# Altium PCB open-rt-pen.PcbDoc
Units mm, origin at the board's own origin, x right, y up, seen from the top; angles counter-clockwise.
Board outline 60 x 9.5 mm, 4 copper layers (Top Layer, Int1 (GND), Int2 (PWR), Bottom Layer), stack 1.642 mm thick; 62 components, 42 nets, 211 pads, 182 vias.
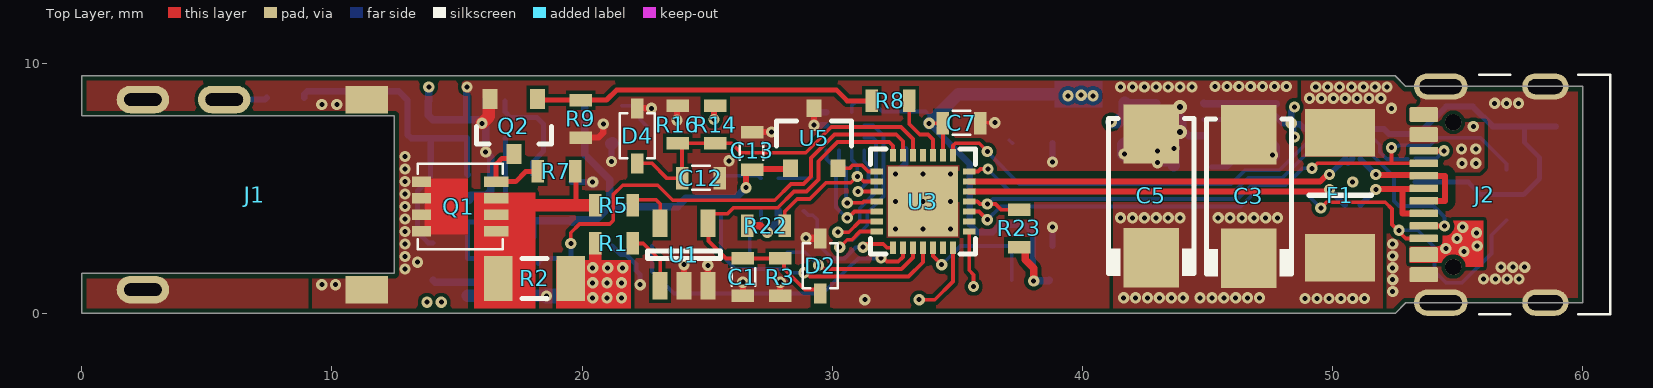
[diagram p0: Top Layer view]
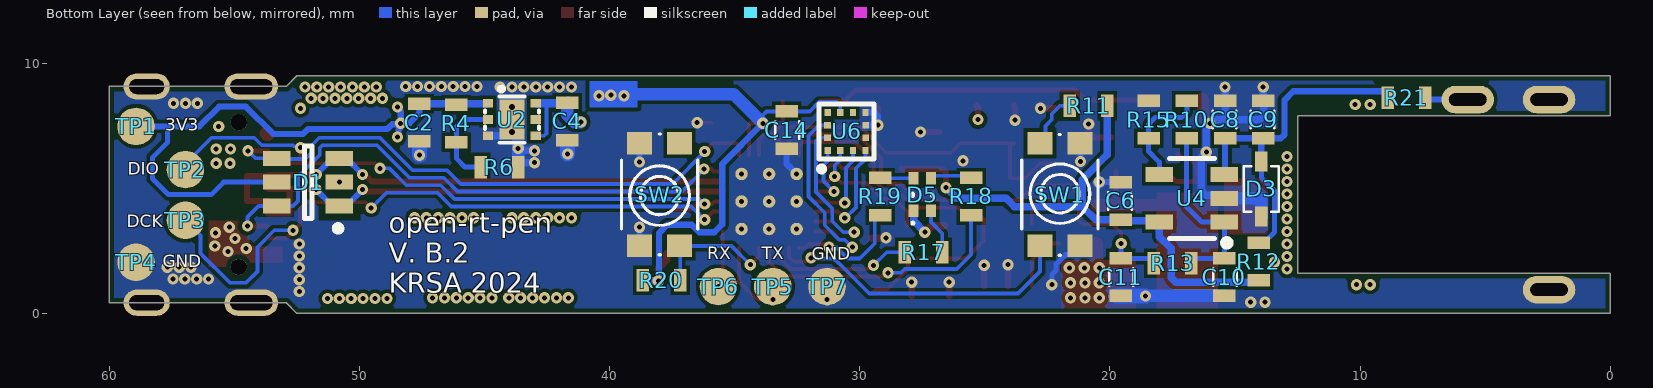
[diagram p1: Bottom Layer view, seen from below]
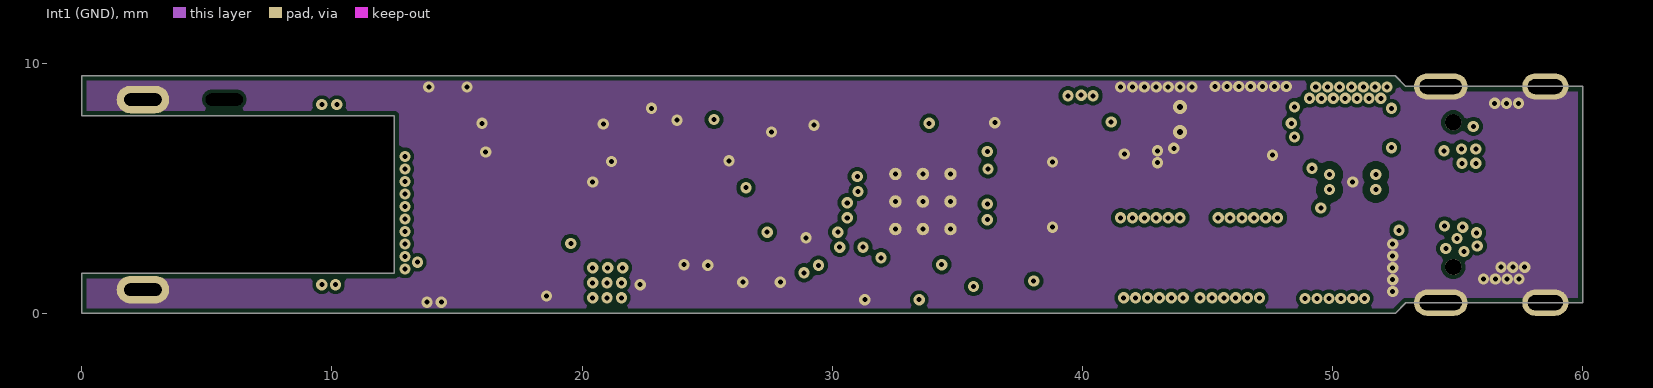
[diagram p2: Int1 (GND)]
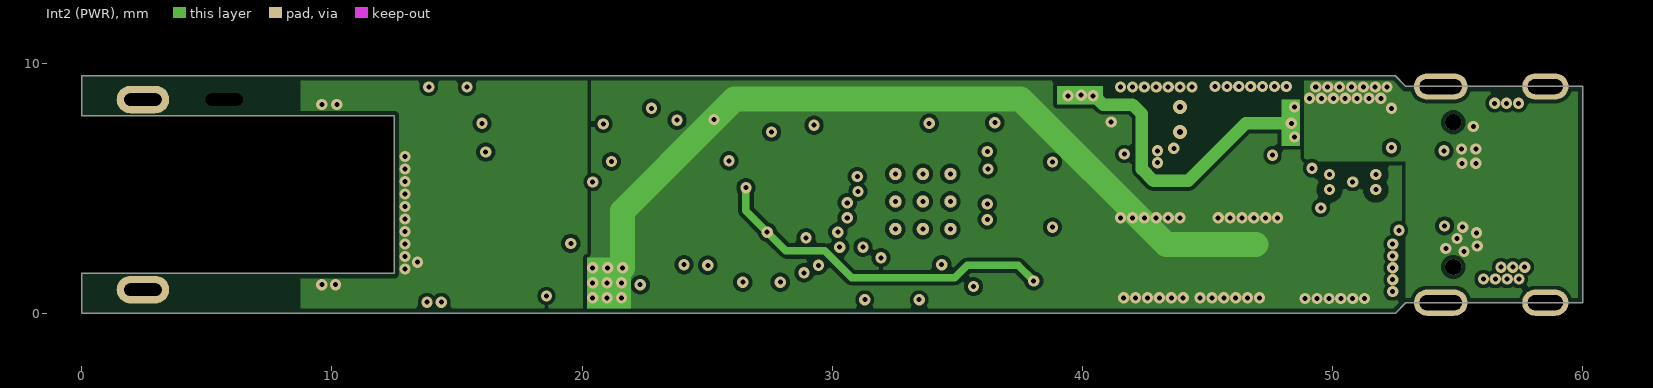
[diagram p3: Int2 (PWR)]
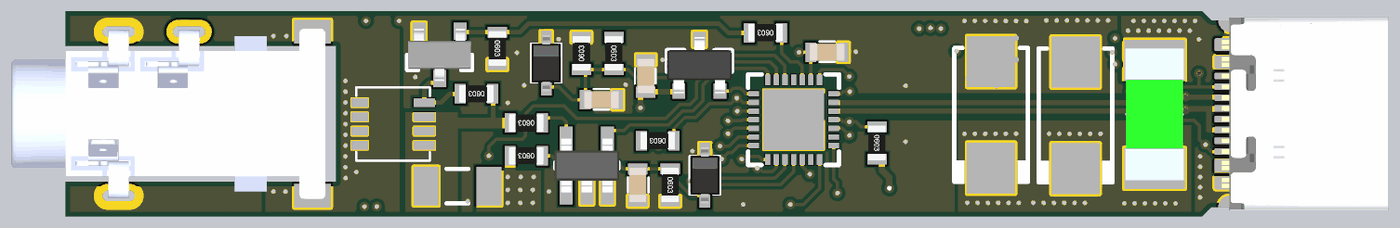
[diagram p4: 3D render of the assembled board from above, using the file's embedded part models]
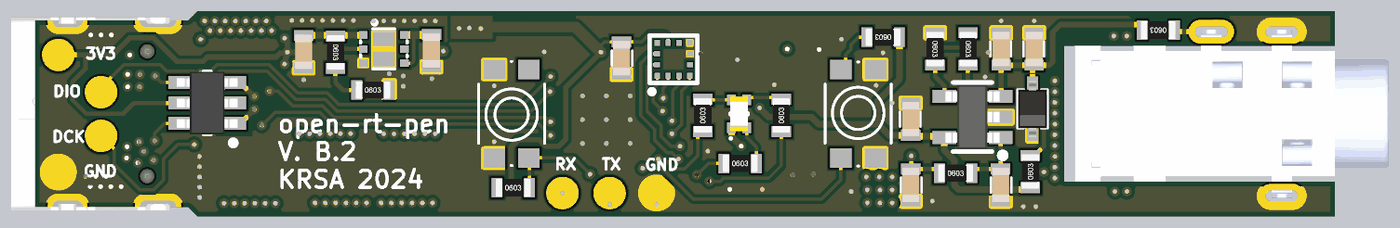
[diagram p5: 3D render of the assembled board from below, using the file's embedded part models]

## Layer stack, top to bottom
Top Solder: solder mask 0.0254, SM-001, Dk 4
Top Layer: signal copper 0.035
7628 1: prepreg 0.2184, PP-023, Dk 4.6
Int1 (GND): signal copper 0.035
CORE: core 1.065, Core-039, Dk 4.8
Int2 (PWR): signal copper 0.035
7628 2: prepreg 0.2184, PP-023, Dk 4.6
Bottom Layer: signal copper 0.035
Bottom Solder: solder mask 0.0254, SM-001, Dk 4

## Board outline
0,7.9 12.5,7.9 12.5,1.6 0,1.6 0,0 52.5,0 52.925,0.425 60,0.425 60,9.075 52.925,9.075 52.5,9.5 0,9.5

## Design rules (kind name [scope] priority, off if disabled: settings)
BoardOutlineClearance [All] p1: gap=0.2 ignorepadtopadclearanceinfootprint=FALSE except(0: Arc-SplitContinuation Track-SplitContinuation SMDPad-SplitContinuation THPad-SplitContinuation Via-SplitContinuation Fill-SplitContinuation Poly-SplitContinuation Region-SplitContinuation Text-SplitContinuation)
Clearance Clearance_USB [InNetClass('USB') vs InPolygon] p1: gap=0.3 ignorepadtopadclearanceinfootprint=FALSE except(0: Arc-Hole Track-Hole SMDPad-Hole THPad-Hole Via-Hole Fill-Hole Poly-Hole Region-Hole Text-Hole)
Clearance [All] p2: gap=0.15 ignorepadtopadclearanceinfootprint=FALSE except(0: Arc-Hole Track-Hole SMDPad-Hole THPad-Hole Via-Hole Fill-Hole Poly-Hole Region-Hole Text-Hole)
DiffPairsRouting [All] p1: maxlimit=0.254 minlimit=0.15 mostfreqgap=0.15 toplayer_minwidth=0.239 toplayer_maxwidth=0.239 toplayer_prefwidth=0.239 midlayer1_minwidth=0.239 midlayer1_maxwidth=0.239 midlayer1_prefwidth=0.239 midlayer2_minwidth=0.239 midlayer2_maxwidth=0.239 midlayer2_prefwidth=0.239 bottomlayer_minwidth=0.239 bottomlayer_maxwidth=0.239 bottomlayer_prefwidth=0.239 maxuncoupledlength=12.7
HoleSize [All] p1: absolutevalues=TRUE maxlimit=3.5 minlimit=0.199 maxpercent=80.000 minpercent=20.000
MinimumAnnularRing [All] p1: minimumring=0.124
MinimumSolderMaskSliver [All] p1 off: minsoldermaskwidth=0.254
NetAntennae [All] p1 off: netantennaetolerance=0
PolygonConnect [All] p1: connectstyle=Direct reliefconductorwidth=0.254 reliefentries=4 polygonreliefangle="90 Angle" airgapwidth=0.254
RoutingVias [All] p1: holewidth=0.711 width=1.27 viastyle="Through Hole" minholewidth=0.711 minwidth=1.27 maxholewidth=0.711 maxwidth=1.27
SilkToSilkClearance [All] p1 off: silktosilkclearance=0.254
SilkToSolderMaskClearance [IsPad] p1 off: minsilkscreentomaskgap=0.254 clearancetoexposedcopper=TRUE
SolderMaskExpansion [All] p1: expansion=0.102 istentingtop=FALSE
Width [All] p1: maxlimit=1 minlimit=0.15 preferedwidth=0.5
24 further rules are at their usual default settings.

## Classes and differential pairs
net class USB: USB_D_N USB_D_P
differential pair USB_D: +USB_D_P -USB_D_N

## Components (designator, comment, footprint, x,y, rotation, side; value= is the part's Value field where it differs from the comment)
C1 "06035C104kAT2A" Generic_Cap0603_2_R 26.425,1.45 r90 top value=100n
C2 "GRM188R61E106KA73D" Generic_Cap0603_2_RW 47.6,7.625 r90 bottom
C3 "F931C107MCCAJ6" Generic_CPOL_C-2312_1P_2N_2 46.65,4.675 r90 top value=100u
C4 "GRM188R61E106KA73D" Generic_Cap0603_2_RW 41.7,7.675 r90 bottom
C5 "F931C107MCCAJ6" Generic_CPOL_C-2312_1P_2N_2 42.75,4.7 r90 top value=100u
C6 "06035C104kAT2A" Generic_Cap0603_2_R 19.575,4.5 r270 bottom value=100n
C7 "06035C104kAT2A" Generic_Cap0603_2_R 35.175,7.6 r180 top value=100n
C8 "06035C104kAT2A" Generic_Cap0603_2_R 15.4,7.75 r270 bottom value=100n
C9 "06035C103kAT2A" Generic_Cap0603_2_R 13.875,7.75 r270 bottom value=10n
C10 "06035C103kAT2A" Generic_Cap0603_2_R 15.425,1.45 r90 bottom value=10n
C11 "06035C104kAT2A" Generic_Cap0603_2_R 19.575,1.45 r90 bottom value=100n
C12 "06035C104kAT2A" Generic_Cap0603_2_R 24.75,5.4 r180 top value=100n
C13 "06035C104kAT2A" Generic_Cap0603_2_R 26.8,6.5 r270 top value=100n
C14 "06035C104kAT2A" Generic_Cap0603_2_R 32.925,7.325 r90 bottom value=100n
D1 "824015" GENERIC_SOT23-6_6_R 52.05,5.25 r0 bottom locked
D2 "CDSOD323-T03C" bourns_SOD323_2 29.525,1.9 r90 top
D3 "CDSOD323-T03C" bourns_SOD323_2 13.95,4.975 r270 bottom
D4 "CDSOD323-T03C" bourns_SOD323_2 22.2,7.1 r90 top
D5 "APHF1608LSEEQBDZGKC" Kingsbright_RGB_LED_0603_RH 27.5,4.75 r90 bottom locked
F1 "0454005.MR" LITTLEFUSE_045401.5MR_2_R 50.3,4.725 r270 top
J1 "SJ-3501-SMT-TR" CUI_SJ-3501-SMT-TR_5 0,4.75 r0 top
J2 "USB4105-GF-A" GCT_USB4105-GF-A_16_R 58.5,4.75 r90 top locked
Q1 "SQS141ELNW" Vishay_PowerPAK_1212-8_8 15.075,4.275 r180 top
Q2 "BSS138" Generic_SOT23_3_RWH 17.275,7.475 r180 top
R1 "RC0603FR-0733RL" Generic_Res0603_2_RW 21.275,2.8 r180 top value=33R
R2 "CSNL1206FT10L0" Generic_Res1206_2_RW 18.1,1.4 r180 top value=0.01R
R3 "RC0603FR-072K2L" Generic_Res0603_2_RW 27.925,1.45 r270 top value=2k2
R4 "RC0603FR-073K9L" Generic_Res0603_2_RW 46.125,7.6 r270 bottom value=3k9
R5 "RC0603FR-0733RL" Generic_Res0603_2_RW 21.275,4.325 r180 top value=33R
R6 "RC0603FR-072K2L" Generic_Res0603_2_RW 44.4,5.85 r180 bottom value=2k2
R7 "RC0603FR-072K2L" Generic_Res0603_2_RW 18.975,5.675 r180 top value=2k2
R8 "RC0603FR-0710RL" Generic_Res0603_2_RW 32.325,8.5 r180 top value=10R
R9 "RC0603FR-0710KL" Generic_Res0603_2_RW 19.94,7.78 r270 top value=10k
R10 "RC0603FR-07100KL" Generic_Res0603_2_RW 16.925,7.75 r270 bottom value=100k
R11 "RC0603FR-0710KL" Generic_Res0603_2_RW 20.85,8.3 r0 bottom value=10k
R12 "RC0603FR-071ML" Generic_Res0603_2_RW 14.05,2.075 r90 bottom value=1M
R13 "RC0603FR-075K6L" Generic_Res0603_2_RW 17.5,2 r180 bottom value=5k6
R14 "RC0603FR-0768KL" Generic_Res0603_2_RW 25.325,7.55 r270 top value=68k
R15 "RC0603FR-07330RL" Generic_Res0603_2_RW 18.45,7.75 r270 bottom value=330R
R16 "RC0603FR-0712KL" Generic_Res0603_2_RW 23.825,7.55 r90 top value=12k
R17 "RC0603FR-07270RL" Generic_Res0603_2_RW 27.45,2.45 r180 bottom value=270R
R18 "RC0603FR-07270RL" Generic_Res0603_2_RW 25.55,4.675 r90 bottom value=270R
R19 "RC0603FR-07270RL" Generic_Res0603_2_RW 29.175,4.675 r90 bottom value=270R
R20 "RC0603FR-0710KL" Generic_Res0603_2_RW 37.925,1.325 r180 bottom value=10k
R21 "RC0603FR-0710KL" Generic_Res0603_2_RW 8.15,8.625 r0 bottom value=10k
R22 "RC0603FR-0710KL" Generic_Res0603_2_RW 27.35,3.5 r180 top value=10k
R23 "RC0603FR-0710KL" Generic_Res0603_2_RW 37.475,3.4 r270 top value=10k
SW1 "KMR231GLFS" CK_KMR231GLFS_4 22,4.75 r270 bottom locked
SW2 "KMR231GLFS" CK_KMR231GLFS_4 38,4.75 r90 bottom locked
TP1 "Testpoint 1.5mm" Generic_SolderPad-1.5x1.5R_1_H 58.925,7.475 r90 bottom
TP2 "Testpoint 1.5mm" Generic_SolderPad-1.5x1.5R_1_H 56.95,5.75 r0 bottom
TP3 "Testpoint 1.5mm" Generic_SolderPad-1.5x1.5R_1_H 56.95,3.725 r0 bottom
TP4 "Testpoint 1.5mm" Generic_SolderPad-1.5x1.5R_1_H 58.925,2.05 r0 bottom
TP5 "Testpoint 1.5mm" Generic_SolderPad-1.5x1.5R_1_H 33.475,1.075 r90 bottom
TP6 "Testpoint 1.5mm" Generic_SolderPad-1.5x1.5R_1_H 35.65,1.075 r90 bottom
TP7 "Testpoint 1.5mm" Generic_SolderPad-1.5x1.5R_1_H 31.305,1.08 r90 bottom
U1 "SI8540-B-FWR" GENERIC_SOT23-5_5_R 24.075,2.35 r90 top
U2 "ADP7142ACPZN-R7" ANALOG_LFCSP6_7_R 43.9,7.75 r180 bottom
U3 "CH32X035G8U6" WCH_QFN28_29 33.625,4.475 r270 top
U4 "TLV333IDBVT" TI_SOT23_5_RH 16.725,4.6 r0 bottom
U5 "MCP9700BT-H/TT" Generic_SOT23_3_R 29.275,7 r90 top
U6 "MC3479" MEMSIC_MC3479_LGA12_12_R 30.525,7.275 r90 bottom

## Footprints (in the part's own frame and the unit in brackets; to place one, negate y for a bottom-side part, rotate by r counter-clockwise, add the part's x,y. Pads: shape width x height; smd on the part's side, far side on the other; paste and mask are expansions set on the pad)
ANALOG_LFCSP6_7_R [mm] "ANALOG_LFCSP6_7_R"
  rect 0.4x0.35 smd mask+0.08: 1(-0.95,0.65) 2(-0.95,0) 3(-0.95,-0.65) 4(0.95,-0.65) 5(0.95,0) 6(0.95,0.65)
  rect 1x1.6 smd paste-2539.97 mask+0.08: 7(0,0)
  silkscreen extent -1.07,-0.92 1.07,1.28, body extent -1.05,-0.85 1.05,0.85, height 0.85
bourns_SOD323_2 [mm] "bourns_SOD323_2"
  rect 0.8x0.5 smd: 1(-1.1,0) 2(1.1,0)
  silkscreen extent -0.9,-0.7 0.9,0.7, body extent -1.3,-0.67 1.3,0.67, height 1.1
CK_KMR231GLFS_4 [mm] "CK_KMR231GLFS_4"
  rect 0.9x1 smd: 1(-2.05,0.8) 1(2.05,0.8) 2(-2.05,-0.8) 2(2.05,-0.8)
  silkscreen extent -2.4,-1.53 2.42,1.53, body extent -2.41,-1.52 2.41,1.52, height 2.52
CUI_SJ-3501-SMT-TR_5 [mm] "CUI_SJ-3501-SMT-TR_5"
  oval 2.1x1.1 hole 0.5 slot 1.5 at 0 deg: 1(2.45,-3.8) 5(2.45,3.8)
  rect 1.7x1.1 smd: 2(11.4,3.8) 4(11.4,-3.8)
  oval 2.1x1.1 / inner oval 0x1.1 / far side oval 2.1x1.1 hole 0.5 slot 1.5 at 0 deg: 3(5.7,3.8)
  body extent -2.5,-3.95 12,3.95, height 2.61
GCT_USB4105-GF-A_16_R [mm] "GCT_USB4105-GF-A_16_R"
  round 0.65 hole 0.65 unplated: 0(-2.89,3.68) 0(2.89,3.68)
  rrect25% 0.6x1.15 smd: A1_B12(-3.2,4.855) A4_B9(-2.4,4.855) B1_A12(3.2,4.855) B4_A9(2.4,4.855)
  rrect25% 0.3x1.15 smd: A5(-1.25,4.855) A6(-0.25,4.855) A7(0.25,4.855) A8(1.25,4.855) B5(1.75,4.855) B6(0.75,4.855) B7(-0.75,4.855) B8(-1.75,4.855)
  oval 1.05x2.15 hole 0.6 slot 1.7 at 90 deg: S1(-4.32,4.18) S4(4.32,4.18)
  oval 1.05x1.85 hole 0.6 slot 1.4 at 90 deg: S2(-4.32,0) S3(4.32,0)
  silkscreen extent -4.79,-2.6 4.79,2.65, body extent -4.47,-2.6 4.47,5.1, height 3.26
Generic_Cap0603_2_R [mm] "Generic Capacitor, 0603"
  rect 0.5x0.9 smd: 1(-0.75,0) 2(0.75,0)
  silkscreen extent -0.35,-0.5 0.35,0.45, body extent -0.8,-0.4 0.8,0.4, height 0.8
Generic_Cap0603_2_RW [mm] "Generic_Cap0603_2_RW"
  rect 0.5x0.9 smd: 1(-0.75,0) 2(0.75,0)
  body extent -0.8,-0.4 0.8,0.4, height 0.8
Generic_CPOL_C-2312_1P_2N_2 [mm] "Generic_CPOL_C-2312_1P_2N_2"
  rect 2.37x2.23 smd: 1(-2.47,0) 2(2.47,0)
  silkscreen extent -3.2,-1.7 3.1,1.7, body extent -3.05,-1.6 3.05,1.6, height 2.6
Generic_Res0603_2_RW [mm] "Generic Resistor, 0603"
  rect 0.5x0.9 smd: 1(-0.75,0) 2(0.75,0)
  body extent -0.8,-0.4 0.8,0.4, height 0.43
Generic_Res1206_2_RW [mm] "Generic Resistor, 1206"
  rect 1.15x1.8 smd: 1(-1.45,0) 2(1.45,0)
  silkscreen extent -0.5,-0.8 0.5,0.8, body extent -1.67,-0.87 1.67,0.87, height 0.75
Generic_SolderPad-1.5x1.5R_1_H [mm] "Generic_SolderPad-1.5x1.5R_1_H"
  round 1.5 smd paste-2539.97 mask+0.102: 1(0,0)
GENERIC_SOT23-5_5_R [mm] "GENERIC_SOT23-5_5_R"
  rect 1.1x0.6 smd: 1(-1.25,0.95) 2(-1.25,0) 3(-1.25,-0.95) 4(1.25,-0.95) 5(1.25,0.95)
  silkscreen extent -0.15,-1.45 0.15,1.45, body extent -1.25,-1.5 1.25,1.5, height 1.1
GENERIC_SOT23-6_6_R [mm] "GENERIC_SOT23-6_6_R"
  rect 1.1x0.6 smd: 1(-1.25,0.95) 2(-1.25,0) 3(-1.25,-0.95) 4(1.25,-0.95) 5(1.25,0) 6(1.25,0.95)
  silkscreen extent -1.32,-1.45 0.15,1.97, body extent -1.4,-1.45 1.4,1.45, height 1.11
Generic_SOT23_3_R [mm] "Generic_SOT23_3_R"
  rect 0.7x0.6 smd: 1(-1.2,0.95) 2(-1.2,-0.95) 3(1.2,0)
  silkscreen extent -0.3,-1.5 0.7,1.5, body extent -1.3,-1.5 1.3,1.5, height 1.1
Generic_SOT23_3_RWH [mm] "Generic_SOT23_3_RWH"
  rect 0.6x0.8 smd: 1(-0.95,-1.1) 2(0.95,-1.1) 3(0,1.1)
  silkscreen extent -1.5,0 1.5,0.7, body extent -1.45,-1.21 1.45,1.21, height 0.97
Kingsbright_RGB_LED_0603_RH [mm] "Kingsbright_RGB_LED_0603_RH"
  rect 0.5x0.4 smd: 1(-0.65,0.35) 2(-0.65,-0.35) 3(0.65,-0.35) 4(0.65,0.35)
  silkscreen extent -1.19,-0.4 0.03,0.43, body extent -0.8,-0.4 0.81,0.4, height 0.76
LITTLEFUSE_045401.5MR_2_R [mm] "LITTLEFUSE_045401.5MR_2_R"
  rect 1.91x2.8 smd: 1(-2.5,0) 2(2.5,0)
  silkscreen extent 0,-1.24 0,1.24, body extent -3.05,-1.35 3.05,1.35, height 2.69
MEMSIC_MC3479_LGA12_12_R [mm] "MEMSIC_MC3479_LGA12_12_R"
  rect 0.275x0.25 smd mask+0.05: 1(-0.763,0.75) 2(-0.763,0.25) 3(-0.763,-0.25) 4(-0.763,-0.75) 7(0.763,-0.75) 8(0.763,-0.25) 9(0.763,0.25) 10(0.763,0.75)
  rect 0.25x0.275 smd mask+0.05: 5(-0.25,-0.763) 6(0.25,-0.763) 11(0.25,0.763) 12(-0.25,0.763)
  silkscreen extent -1.59,-1.1 1.1,1.1, body extent -1,-1 1,1, height 0.94
TI_SOT23_5_RH [mm] "TI_SOT23_5_RH"
  rect 1.1x0.6 smd: 1(-1.3,0.95) 2(-1.3,0) 3(-1.3,-0.95) 4(1.3,-0.95) 5(1.3,0.95)
  silkscreen extent -1.54,-1.6 0.9,1.92, body extent -1.25,-1.5 1.25,1.5, height 1.1
Vishay_PowerPAK_1212-8_8 [mm] "Vishay_PowerPAK_1212-8_8"
  rect 0.99x0.405 smd mask+0.05: 1(-1.492,0.99) 2(-1.492,0.33) 3(-1.492,-0.33) 4(-1.492,-0.99)
  rect 0.76x0.405 smd mask+0.05: 5(1.493,-0.99) 6(1.493,-0.33) 7(1.493,0.33) 8(1.493,0.99)
  Top Layer region: 1.362,-1.117 1.362,1.118 -0.363,1.118 -0.363,-1.117
  silkscreen extent -1.75,-1.7 1.65,1.7, body extent -1.77,-1.65 1.66,1.65, height 0.76
WCH_QFN28_29 [mm] "WCH_QFN28_29"
  rect 0.5x0.25 smd mask+0.05: 1(-1.85,1.2) 2(-1.85,0.8) 3(-1.85,0.4) 4(-1.85,0) 5(-1.85,-0.4) 6(-1.85,-0.8) 7(-1.85,-1.2) 15(1.85,-1.2) 16(1.85,-0.8) 17(1.85,-0.4) 18(1.85,0) 19(1.85,0.4) 20(1.85,0.8) 21(1.85,1.2)
  rect 0.25x0.5 smd mask+0.05: 8(-1.2,-1.85) 9(-0.8,-1.85) 10(-0.4,-1.85) 11(0,-1.85) 12(0.4,-1.85) 13(0.8,-1.85) 14(1.2,-1.85) 22(1.2,1.85) 23(0.8,1.85) 24(0.4,1.85) 25(0,1.85) 26(-0.4,1.85) 27(-0.8,1.85) 28(-1.2,1.85)
  round 0.5 hole 0.2 mask+0.102: 29(-1.1,1.1) 29(-1.1,0) 29(-1.1,-1.1) 29(0,1.1) 29(0,0) 29(0,-1.1) 29(1.1,1.1) 29(1.1,0) 29(1.1,-1.1)
  rect 2.8x2.8 smd mask+0.05: 29(0,0)
  silkscreen extent -2.1,-2.1 2.1,2.1, body extent -2.02,-2.02 2.02,2.02, height 0.91

## Part data
C1 C6 C7 C8 C11 C12 C13 C14: library part KYOCERA_AVX_X7R-DIELECTRIC-0000-A.1, "100n, X7R, 10%, 50V, 0603", Manufacturer="Kyocera AVX", Manufacturer PartNr=06035C104kAT2A, ShortDescription=100n
C2 C4: library part Baugruppenfertigung-0041-A.5, "10uF, X5R, 10%, 25V", Manufacturer=Murata, Manufacturer PartNr=GRM188R61E106KA73D, ShortDescription=10uF
C3 C5: library part KRSA-0126-A.1, "100u, TANTAL, 20%, 16V, C(2312)", Manufacturer=AVX, Manufacturer PartNr=F931C107MCCAJ6, ShortDescription=100u
C9 C10: library part KYOCERA_AVX_X7R-DIELECTRIC-0001-A.2, "10n, X7R, 10%, 50V, 0603", Manufacturer="Kyocera AVX", Manufacturer PartNr=06035C103kAT2A, ShortDescription=10n
D1: library part KRSA-0098-A.1, "TVS Diode Array, 5V, Unidirectional", Manufacturer=Wurth, Manufacturer PartNr=824015, ShortDescription=824015
D2 D3 D4: library part 4.6520.059.01_Hilti_Rebar_Detector-0042-A.1, "TVS Diode, bidirectional, 3V3, 1pF", Manufacturer=bourns, Manufacturer PartNr=CDSOD323-T03C, ShortDescription=T03C
D5: library part Component-00142-A.1, "LED RGB 0603 SMD", Manufacturer=Kingsbright, Manufacturer PartNr=APHF1608LSEEQBDZGKC, ShortDescription="Description (used in sheet)"
F1: library part 4.6520.020_Palindrome_RTSDrone-0335-A.1, "Nano Slo-Blo, Surface Mount Fuse, 5A", Manufacturer=Littlefuse, Manufacturer PartNr=0454005.MR, ShortDescription=5A
J1: library part KRSA-0117-A.1, "Audio Jack, 3.5mm, Mid Mount", Manufacturer=CUI, Manufacturer PartNr=SJ-3501-SMT-TR, ShortDescription=SJ-3501-SMT-TR
J2: library part KRSA-0082-A.1, "USB Type C, Edge Mount, USB 2.0", Manufacturer=GCT, Manufacturer PartNr=USB4105-GF-A, ShortDescription=USB-C
Q1: library part KRSA-0111-A.1, "MOSFET, P-Ch, 40V, 100A", Manufacturer=Vishay, Manufacturer PartNr=SQS141ELNW, ShortDescription=SQS141ELNW
Q2: library part 00000_Hilti_Localisation_MA-0139-A.4, "MOSFET, N-Ch, 50V, 220mA", Manufacturer=ON, Manufacturer PartNr=BSS138, ShortDescription=BSS138
R1 R5: library part YAEGO_RC0603FR-07-0019-A.2, "33R, 1%, 0.1W, 0603", Manufacturer=YAGEO, Manufacturer PartNr=RC0603FR-0733RL, ShortDescription=33R
R2: library part KRSA-0128-A.1, "0.01R, Shunt, 1W, 1%, 1206", Manufacturer="Stackpole Electronics Inc", Manufacturer PartNr=CSNL1206FT10L0, ShortDescription=0.01R
R3 R6 R7: library part YAEGO_RC0603FR-07-0041-A.2, "2k2, 1%, 0.1W, 0603", Manufacturer=YAGEO, Manufacturer PartNr=RC0603FR-072K2L, ShortDescription=2k2
R4: library part YAEGO_RC0603FR-07-0044-A.1, "3k9, 1%, 0.1W, 0603", Manufacturer=YAGEO, Manufacturer PartNr=RC0603FR-073K9L, ShortDescription=3k9
R8: library part YAEGO_RC0603FR-07-0013-A.2, "10R, 1%, 0.1W, 0603", Manufacturer=YAGEO, Manufacturer PartNr=RC0603FR-0710RL, ShortDescription=10R
R9 R11 R20 R21 R22 R23: library part YAEGO_RC0603FR-07-0049-A.1, "10k, 1%, 0.1W, 0603", Manufacturer=YAGEO, Manufacturer PartNr=RC0603FR-0710KL, ShortDescription=10k
R10: library part YAEGO_RC0603FR-07-0061-A.1, "100k, 1%, 0.1W, 0603", Manufacturer=YAGEO, Manufacturer PartNr=RC0603FR-07100KL, ShortDescription=100k
R12: library part YAEGO_RC0603FR-07-0073-A.1, "1M, 1%, 0.1W, 0603", Manufacturer=YAGEO, Manufacturer PartNr=RC0603FR-071ML, ShortDescription=1M
R13: library part YAEGO_RC0603FR-07-0046-A.1, "5k6, 1%, 0.1W, 0603", Manufacturer=YAGEO, Manufacturer PartNr=RC0603FR-075K6L, ShortDescription=5k6
R14: library part YAEGO_RC0603FR-07-0059-A.1, "68k, 1%, 0.1W, 0603", Manufacturer=YAGEO, Manufacturer PartNr=RC0603FR-0768KL, ShortDescription=68k
R15: library part YAEGO_RC0603FR-07-0031-A.2, "330R, 1%, 0.1W, 0603", Manufacturer=YAGEO, Manufacturer PartNr=RC0603FR-07330RL, ShortDescription=330R
R16: library part YAEGO_RC0603FR-07-0050-A.1, "12k, 1%, 0.1W, 0603", Manufacturer=YAGEO, Manufacturer PartNr=RC0603FR-0712KL, ShortDescription=12k
R17 R18 R19: library part YAEGO_RC0603FR-07-0030-A.2, "270R, 1%, 0.1W, 0603", Manufacturer=YAGEO, Manufacturer PartNr=RC0603FR-07270RL, ShortDescription=270R
SW1 SW2: library part 10707_OST_EuR2_Projekt-0018-A.1, "Tactile Switch, Thin Type", Manufacturer=CK, Manufacturer PartNr=KMR231GLFS, ShortDescription=KMR231GLFS
TP1 TP2 TP3 TP4 TP5 TP6 TP7: library part KRSA-0230-A.1, "Testpoint, round, 1.5mm", Manufacturer=Generic, Manufacturer PartNr=-, ShortDescription=Testpoin
U1: library part KRSA-0131-A.1, "High-side Current Sense Amplifier", Manufacturer=Skyworks, Manufacturer PartNr=SI8540-B-FWR, ShortDescription=SI8540
U2: library part KRSA-0055-A.2, "40 V, 200 mA, Low Noise, ADJ CMOS LDO Linear Regulator", Manufacturer=Analog, Manufacturer PartNr=ADP7142ACPZN-R7, ShortDescription=ADP7142
U3: library part KRSA-0178-A.3, "WCH CH32, USB, USB-PD, I2C, SPI, UART, OPA, CMP, ADC, TOUCH", Manufacturer=WCH, Manufacturer PartNr=CH32X035G8U6, ShortDescription=CH32X035G8U6
U4: library part KRSA-0108-A.1, "350kHz GBW, Low Noise, Zero Drift, 5.5V", Manufacturer=TI, Manufacturer PartNr=TLV333IDBVT, ShortDescription=TLV333
U5: library part KRSA-0242-A.1, "Temperature Sensor, Analog, +/- 1°C, SOT23", Manufacturer=Microchip, Manufacturer PartNr=MCP9700BT-H/TT, ShortDescription=MCP9700BT-H/TT
U6: library part KRSA-0245-A.1, "3-Axis Accelerometer", Manufacturer=MEMSIC, Manufacturer PartNr=MC3479, ShortDescription=MC3479

## Via types
v1: diameter 0.45, hole 0.2, Top Layer to Bottom Layer, tented both sides, 180 vias
v2: diameter 0.55, hole 0.25, Top Layer to Bottom Layer, tented top, 2 vias

## Nets (pads, with @x,y where several pads share a name; then routed paths per layer and width w, separated by ;. In a path a pad name is that pad's centre, name@x,y a point inside that pad or via, vN(x,y) a via of type N, cw(c..) or ccw(c..) an arc to the next point about the centre after c; other vN are vias at no path point)
3V3: C2.2 C6.2 C7.2 C13.2 C14.2 D1.5 D5.1 R4.1 R11.1 R12.1 R20.1 R22.2 R23.2 TP1.1 U2.1 U3.2 U4.5 U5.1 U6.9 | length 98.5
  Top Layer w0.15: v1(33.875,7.6) C7.2 U3.2
  Top Layer w0.25: v1(26.55,5.025) 26.55,5.625 26.675,5.75 C13.2 26.825,5.775 28.3,5.775 U5.1
  Top Layer w0.3: R22.2 27.12,3.5 27.37,3.25 v1(27.4,3.25) ; 37.708,2.394 37.708,2.142 38.05,1.8 v1(38.05,1.3)
  Int2 (PWR) w0.3: v1(26.55,5.025) 26.55,4.1 v1(27.4,3.25) 28.15,2.5 29.708,2.5 30.783,1.425 34.9,1.425 35.4,1.925 37.425,1.925 v1(38.05,1.3)
  Int2 (PWR) w0.5: v1(40.425,8.7) 40.475,8.7 40.825,8.35 42,8.35 42.375,7.975 42.375,5.766 42.841,5.3 44.225,5.3 46.525,7.6 v1(48.35,7.6)
  Bottom Layer w0.15: U6.9 30.775,8.3 30.925,8.45 31.625,8.45 32,8.075 C14.2 33.725,8.075 33.875,7.925 v1(33.875,7.6)
  Bottom Layer w0.2: D1.5 55.425,5.25 55.925,4.75 57.625,4.75 58.272,5.397 58.272,6.228 57.663,6.837 57.663,7.475
  Bottom Layer w0.25: v1(33.875,7.6) 35.5,5.975 35.5,3.559 35.809,3.25 36.411,3.25 36.711,3.55 37.689,3.55 38.025,3.214 38.025,1.325 v1(38.05,1.3) ; C2.2 47.6,8 48,7.6 v1(48.35,7.6) ; v1(48.475,7.05) 48.437,7.088 48.437,7.338 48.375,7.4 v1@48.375,7.575 ; v1(48.475,8.25) 48.475,8.196 48.35,8.071 v1(48.35,7.6) ; TP1.1 57.663,7.475 56.4,7.475 55.605,8.27 54.545,8.27 53.45,7.175 52.25,7.175 52.05,7.375 48.875,7.375 48.688,7.562 48.388,7.562 v1@48.375,7.575 ; v1(48.35,7.6) v1@48.375,7.575
  Bottom Layer w0.3: R12.1 14.125,1.25 17.374,1.25 17.55,1.426 17.55,2.6 18.025,3.075 U4.5 ; C6.2@19.575,3.675 C6.2@19.6,3.65 ; R11.1 20.1,6.353 21.1,5.353 21.1,4.275 ; v1(26.55,5.025) 26.125,4.6 24.15,4.6 23.825,4.275 21.1,4.275 ; v1(27.4,3.25) 27.85,3.7 D5.1 ; v1(38.05,1.3) 38.65,1.3 R20.1 ; U2.1 44.863,8.388 47.738,8.388 C2.2@47.75,8.375 ; U4.5@17.75,3.625 17.775,3.65 U4.5 ; U4.5@17.75,3.625 17.625,3.5 17.625,3.75 U4.5@17.75,3.625 ; U4.5 18.075,3.7 19.525,3.7 C6.2 20.575,3.75 21.1,4.275
  Bottom Layer w0.5: v1(33.875,7.6) 35.037,8.762 39.363,8.762 v1(39.425,8.7)
  other v1: 39.95,8.725
ACC_INT1: U3.13 U6.12 | length 6.8
  Top Layer w0.15: v1(30.225,3.25) 30.661,3.25 31.086,3.675 U3.13
  Bottom Layer w0.15: v1(30.225,3.25) 30.661,3.25 31.1,3.689 31.1,4.2 31.75,4.85 31.75,6.9 31.625,7.025 U6.12
ACC_INT2: U3.14 U6.11 | length 8
  Top Layer w0.15: v1(30.3,2.65) 30.6,2.95 30.786,2.95 31.111,3.275 U3.14
  Bottom Layer w0.15: v1(30.3,2.65) 30.6,2.95 30.825,2.95 31.4,3.525 31.4,4.025 32.05,4.675 32.05,7.1 31.625,7.525 U6.11
BTN0: R11.2 SW1.2 U3.16 | length 14.2
  Top Layer w0.15: v1(31.95,2.225) 32.031,2.225 32.181,2.075 32.515,2.075 32.639,2.075 32.825,2.261 U3.16
  Bottom Layer w0.15: R11.2 22,8.3 22.325,7.975 22.325,7.75 22.579,7.496 22.579,7.252 ; SW1.2@22.8,2.7 22.8,1.675 23.675,0.8 29.62,0.8 30.739,1.918 30.74,1.92 cw(c36.564,-4.207) 31.008,2.164 31.05,2.2 31.106,2.2 31.925,2.2 v1(31.95,2.225)
BTN1: R20.2 SW2.2 U3.19 | length 5.5
  Top Layer w0.15: U3.19 34.025,2.3 v1(34.375,1.95)
  Bottom Layer w0.15: v1(34.375,1.95) 35.125,2.7 35.575,2.7 37.2,2.7 37.175,2.675 R20.2 ; SW2.2@37.075,6.925 SW2.2@37.2,6.8
DCK: J2.B8 TP3.1 U3.24 | length 27.3
  Top Layer w0.15: U3.24 35.864,4.075 36.189,3.75 v1(36.2,3.75) ; v1(49.527,4.219) 49.756,4.448 52.102,4.448 52.375,4.175 52.375,3.55 52.925,3 J2.B8
  Bottom Layer w0.15: v1(36.2,3.75) 36.211,3.75 36.736,4.275 46.324,4.275 46.874,4.825 48.921,4.825 v1(49.527,4.219) ; v1(52.65,3.325) 53.4,3.325 54.075,2.65 54.075,1.675 54.525,1.225 55.175,1.225 56.35,2.4 56.35,3.125 TP3.1
DIO: J2.A8 R23.1 TP2.1 U3.25 | length 26.5
  Top Layer w0.15: U3.25 35.8,4.475 35.9,4.375 v1(36.2,4.375) 36.525,4.375 36.75,4.15 R23.1 ; v1(49.175,5.8) 49.199,5.8 49.399,6 52.35,6 ; v1@52.35,6.775 v1(52.35,6.625) 52.35,6 ; J2.A8 52.35,6
  Bottom Layer w0.15: v1(36.2,4.375) 36.224,4.375 36.424,4.575 46.199,4.575 46.749,5.125 48.124,5.125 48.799,5.8 v1(49.175,5.8) ; v1(52.35,6.625) 52.407,6.682 52.614,6.682 52.657,6.725 53.9,6.725 54.2,7.025 55.911,7.025 56.061,6.875 56.95,5.986 TP2.1
GND: C1.1 C2.1 C3.2 C4.1 C5.2 C6.1 C7.1 C8.1 C9.1 C10.1 C11.1 C12.1 C13.1 C14.1 D1.2 D2.2 D3.2 D4.2 J1.1 J1.5 J2.A1_B12 J2.B1_A12 J2.S1 J2.S2 J2.S3 J2.S4 Q2.2 R3.2 R6.2 R9.2 R15.1 R16.2 SW1.1 SW2.1 TP4.1 TP7.1 U1.2 U1.3 U2.3 U2.7 U3.29 U4.2 U5.3 U6.6 U6.7 | length 37
  Top Layer w0.15: C7.1 35.95,7.625 v1(36.5,7.625)
  Top Layer w0.25: R9.2 20.655,7.03 20.85,7.225 v1(20.85,7.575) ; D4.2 v1(22.775,8.2) ; v1(23.8,7.725) 23.8,8.275 R16.2 ; U1.2 v1@24.075,1.925 ; U1.3 v1(25.025,1.925) ; C1.1 v1(26.425,1.25) ; C13.1 v1(27.575,7.25) ; R3.2 v1(27.925,1.25) ; v1(29.275,7.525) U5.3
  Top Layer w0.3: v1(28.95,3.025) 28.962,3.013 29.512,3.013 D2.2
  Top Layer w0.5: v1(16,7.6) 16.275,7.875 16.275,8.525 Q2.2
  Bottom Layer w0.2: SW1.1@21.2,2.7 21.55,2.35 21.772,2.35 22.15,1.972 22.15,1.725 22.325,1.55 v1(22.325,1.15)
  Bottom Layer w0.25: C6.1 v1(20.425,5.25) ; v1(21.175,6.075) SW1.1@21.175,6.775 ; U6.6 v1(29.275,7.525) 29.275,7.892 29.421,8.038 U6.7 ; U3.29@32.525,5.575 32.925,5.975 C14.1 ; SW2.1@38.8,2.7 v1(38.8,3.45) ; v1(38.8,6.05) SW2.1@38.8,6.8
  Bottom Layer w0.3: v1(13.875,9.05) C9.1 13.85,8.475 13.85,7.926 14.026,7.75 15.4,7.75 ; v1(15.4,9.05) C8.1 15.4,7.75 ; U4.2 15.55,4.725 16.174,4.725 16.35,4.901 16.35,6.25 v1(16.15,6.45) 16.15,7.45 v1(16,7.6) 15.85,7.75 15.4,7.75 ; C11.1 C11.1@19.588,0.713 ; v1(43,6.025) 43.55,6.025 43.65,5.925 R6.2 ; v1(43,6.5) 43.029,6.529 43.538,6.529 43.609,6.6 v1(43.65,6.6) ; U2.7@44,7.35 44.25,7.1 U2.3
  Bottom Layer w0.5: D3.2 13.95,4.6 U4.2 ; C10.1 v1(18.575,0.7) ; SW1.1@21.175,6.775 SW1.1@21.2,6.8 ; R6.2@43.65,5.925 v1(43.65,6.6) 43.65,7.333 U2.7@43.733,7.417 ; v2(43.9,7.25) U2.7
  Bottom Layer w0.6: v1(18.575,0.7) C11.1 C11.1@19.75,0.7 ; v1(41.675,6.375) C4.1@41.675,6.725 ; v1(47.6,6.325) C2.1@47.6,6.625
  other v1: 13.8,0.45 14.375,0.45 31.3,0.55 52.4,0.875 52.4,1.35 56.025,1.375 56.5,1.375 56.975,1.375 57.45,1.375 52.4,1.825 56.725,1.85 57.2,1.85 57.675,1.85 24.075,1.95 52.4,2.3 52.4,2.775 50.8,5.25 25.875,6.1 56.475,8.4 56.95,8.4 57.425,8.4 41.525,9.05 42,9.05 42.475,9.05 42.95,9.05 43.425,9.05 43.9,9.05 44.375,9.05 45.3,9.075 45.775,9.075 46.25,9.075 46.725,9.075 47.2,9.075 47.675,9.075 48.15,9.075
  other v2: 43.9,8.25
I_TIP: C1.2 D2.1 R3.1 U1.4 U3.7 | length 15.9
  Top Layer w0.15: D2.1 29.363,0.962 28.901,0.962 28.075,1.788 28.075,2.05 R3.1 C1.2 25.75,2.2 25.05,2.9 25.05,3.575 U1.4 25.025,3.757 25.25,3.982 25.807,3.982 26.05,4.225 27.826,4.225 28.476,4.875 28.975,4.875 29.45,5.35 29.45,6.087 30.213,6.85 32.275,6.85 32.425,6.7 U3.7
LED0: R19.1 U3.15 | length 5.3
  Top Layer w0.15: v1@31.35,2.775 32.036,2.775 32.186,2.625 U3.15
  Bottom Layer w0.15: R19.1@28.85,4.1 29.025,3.925 R19.1@29.05,3.925 ; R19.1@28.875,4.1 R19.1@29.05,3.925 ; v1(31.225,2.65) 31.214,2.639 30.925,2.639 30.486,2.2 30,2.2 29.4,2.8 29.4,3.75 29.225,3.925 R19.1 R19.1@29.05,3.925
LED1: R18.1 U3.18 | length 10.8
  Top Layer w0.15: v1(28.875,1.625) 28.956,1.625 29.106,1.475 33.05,1.475 33.625,2.05 U3.18
  Bottom Layer w0.15: R18.1 25.55,2.35 26.125,1.775 27.225,1.775 28.2,1.775 28.35,1.625 v1(28.875,1.625)
LED2: R17.1 U3.17 | length 5.9
  Top Layer w0.15: v1(29.45,1.925) 29.531,1.925 29.681,1.775 32.763,1.775 33.225,2.237 U3.17
  Bottom Layer w0.15: R17.1 28.925,2.45 v1(29.45,1.925)
NetC8_2: C8.2 C9.2 D3.1 R12.2 R21.2 U4.3 | length 14.5
  Bottom Layer w0.2: D3.1 13.95,5.425 13.423,4.898 13.423,3.36 13.427,3.356 13.427,3.248 13.85,2.825 R12.2
  Bottom Layer w0.254: R21.2 8.9,8.755 9.023,8.878 12.672,8.878 13.025,8.525 13.025,7.149 13.174,7 C9.2 C9.2@13.95,7 ; D3.1 C9.2@13.95,7 ; U4.3 15.4,5.575 C8.2 C9.2@13.95,7
NetC10_2: C10.2 R10.2 R13.2 U4.1 | length 7.4
  Bottom Layer w0.2: R13.2 16.75,2.05 16.6,2.2 C10.2 U4.1 16.325,3.65 16.95,4.275 16.95,6.975 R10.2
NetD5_2: D5.2 R17.2 | length 1.8
  Bottom Layer w0.15: R17.2 26.7,3.2 27.15,3.65 D5.2
NetD5_3: D5.3 R18.2 | length 2
  Bottom Layer w0.15: R18.2@25.2,5.4 25.525,5.4 25.625,5.5 27.05,5.5 D5.3
NetD5_4: D5.4 R19.2 | length 1.3
  Bottom Layer w0.15: D5.4 29.15,5.4 R19.2
NetJ1_2: J1.2 J1.4 Q1.5 Q1.6 Q1.7 Q1.8
  other v1: 9.6,1.15 10.15,1.15 12.925,1.775 13.425,2.05 12.925,2.275 12.925,2.775 12.925,3.275 12.925,3.775 12.925,4.275 12.925,4.775 12.925,5.275 12.925,5.775 12.925,6.275 9.6,8.35 10.2,8.35
NetJ1_3: J1.3 R21.1 | length 1.7
  Bottom Layer w0.25: J1.3 7.325,8.55 R21.1
NetQ1_1: Q1.1 Q1.2 Q1.3 R2.2 R5.2 R7.1 | length 5.6
  Top Layer w0.2: Q1.3 Q1.3@16.67,4.707 ; R2.2 R2.2@16.725,1.475 ; 19.725,4.325 19.75,4.325 R7.1@19.75,5.7
  Top Layer w0.5: 16.567,4.325 19.725,4.325 ; 19.75,4.325 R5.2
NetQ1_4: Q1.4 Q2.3 R7.2 | length 3.4
  Top Layer w0.2: Q2.3 17.092,6.192 16.792,6.192 16.567,5.967 Q1.4 16.573,5.27 17.345,5.27 17.742,5.667 R7.2@18.217,5.667
NetQ2_1: Q2.1 R8.2 R9.1 | length 13.7
  Top Layer w0.2: Q2.1@18.225,8.53 R9.1 20.98,8.53 21.375,8.925 30.175,8.925 30.6,8.5 R8.2
NetR1_1: R1.1 U1.1 | length 2.4
  Top Layer w0.15: R1.1 22.45,2.8 23.125,2.125 U1.1
NetR4_2: R4.2 R6.1 U2.2 | length 3.8
  Bottom Layer w0.2: U2.2 45.825,7.75 46.125,7.45 R4.2 46.125,6.2 45.775,5.85 R6.1
NetR5_1: R5.1 U1.5 | length 2.1
  Top Layer w0.15: R5.1 22.025,4.5 22.075,4.55 22.95,4.55 23.125,4.375 U1.5
NetR10_1: R10.1 R15.2 U4.4 | length 4.4
  Bottom Layer w0.2: R10.1 16.925,8.05 17.15,7.825 18.2,7.825 18.45,7.575 R15.2 18.45,6.475 18.025,6.05 U4.4
PWM_TIP: R8.1 U3.3 | length 2.8
  Top Layer w0.15: R8.1 33.075,7.575 33.5,7.15 33.825,7.15 34.025,6.95 U3.3
SPI_CS: R22.1 U3.9 U6.2 | length 6
  Top Layer w0.15: R22.1 28.1,4.075 28.6,4.575 29.099,4.575 29.749,5.225 30.739,5.225 30.989,5.475 v1(31,5.475) 31.061,5.475 31.261,5.275 U3.9
  Bottom Layer w0.15: U6.2 30.775,6.15 31,5.925 v1(31,5.475)
SPI_MISO: U3.11 U6.3 | length 3.4
  Top Layer w0.15: v1(30.6,4.425) 31.211,4.425 31.261,4.475 U3.11
  Bottom Layer w0.15: U6.3 30.275,6.1 30.55,5.825 30.55,4.475 v1(30.6,4.425)
SPI_MOSI: U3.12 U6.4 | length 4.3
  Top Layer w0.15: v1(30.6,3.825) 30.636,3.825 30.886,4.075 U3.12
  Bottom Layer w0.15: U6.4 29.775,6.176 30.15,5.801 30.15,4.239 30.564,3.825 v1(30.6,3.825)
SPI_SCK: U3.10 U6.1 | length 2.5
  Top Layer w0.15: v1@31.175,4.875 U3.10
  Bottom Layer w0.15: v1(31.025,4.875) 31.036,4.875 31.45,5.289 31.45,5.925 31.275,6.1 U6.1
T_AMB: U3.8 U5.2 | length 1.7
  Top Layer w0.15: U5.2 30.689,5.8 30.814,5.925 31.186,5.925 31.436,5.675 U3.8
T_TIP: C11.2 R13.1 U3.6 | length 19.6
  Top Layer w0.15: v1(19.55,2.8) 19.55,3.225 19.9,3.575 21.104,3.575 21.25,3.721 21.25,4.75 21.625,5.125 23.025,5.125 23.625,4.525 27.701,4.525 28.351,5.175 28.851,5.175 29.15,5.474 29.15,6.211 30.089,7.15 32.555,7.15 32.825,6.88 U3.6
  Bottom Layer w0.2: R13.1 18.25,2.05 18.4,2.2 C11.2 19.55,2.225 v1(19.55,2.8)
UART_RX: TP6.1 U3.22 | length 2.3
  Top Layer w0.15: U3.22 35.475,1.725 35.65,1.55 v1(35.65,1.075)
UART_TX: TP5.1 U3.21 | length 3
  Top Layer w0.15: v1(33.475,0.55) 34.1,0.55 34.825,1.275 U3.21
USB_CC1: D1.6 J2.A5 U3.28 | length 23.4
  Top Layer w0.15: U3.28 35.825,5.675 35.925,5.775 v1(36.225,5.775)
  Top Layer w0.2: J2.A5@53.67,3.5 v1(54.475,3.5)
  Bottom Layer w0.15: v1@36.213,5.869 36.213,5.762 37.1,4.875 46.075,4.875 46.625,5.425 48,5.425 49.3,6.725 51.479,6.725 51.582,6.622 51.582,6.329 52.45,5.461 52.45,4.5 52.65,4.3 D1.6 53.308,4.292 54.033,4.292 54.475,3.85 v1(54.475,3.5)
USB_CC2: D1.4 J2.B5 U3.1 | length 22.7
  Top Layer w0.15: U3.1 34.825,6.712 34.913,6.8 35.875,6.8 v1(36.2,6.475)
  Top Layer w0.2: J2.B5 v1(54.45,6.5)
  Bottom Layer w0.15: v1(36.2,6.475) 36.2,6.45 37.475,5.175 45.951,5.175 46.501,5.725 47.875,5.725 49.175,7.025 51.604,7.025 51.882,6.746 51.882,6.453 52.161,6.175 D1.4@53,6.175 ; D1.4 54.15,6.2 v1(54.45,6.5)
USB_D_N: D1.1 J2.A7 J2.B7 U3.26 | length 20
  Top Layer w0.239: U3.26 49.743,4.875 49.818,4.95 v1(49.875,4.95) ; v1(51.725,4.95) 51.75,4.975 52.8,4.975 ; J2.B7@53.618,4.027 J2.B7 52.8,4 52.8,4.975 ; J2.A7 53.62,4.975 52.8,4.975
  Bottom Layer w0.239: v1@49.875,4.944 D1.1@50.484,4.334 ; D1.1@51.116,4.334 51.725,4.944 v1(51.725,4.95)
USB_D_P: D1.3 J2.A6 J2.B6 U3.27 | length 21.2
  Top Layer w0.239: U3.27 35.48,5.27 49.495,5.27 v1@49.797,5.571 ; v1@49.818,5.55 v1(49.875,5.55) ; v1(51.725,5.55) 51.75,5.525 53.62,5.525 J2.B6 54.5,5.5 54.5,4.5 J2.A6
  Bottom Layer w0.239: v1(49.875,5.55) 49.875,5.556 D1.3@50.522,6.203 ; D1.3@50.62,6.02 D1.3 ; D1.3@51.116,6.166 v1@51.725,5.556
VBUS: C3.1 C4.2 C5.1 F1.2 R1.2 R2.1 R14.1 U2.4 U2.6 | length 37.6
  Top Layer w0.2: R2.1 R2.1@19.575,1.425
  Top Layer w0.25: v1(25.275,7.75) 25.275,8.25 R14.1
  Top Layer w0.5: v1@20.525,1.85 R1.2 ; v1@20.925,1.85 21,1.85 v1(21.025,1.825)
  Int2 (PWR) w1: v1(21.625,1.825) 21.625,4.1 v1(25.275,7.75) 26.1,8.575 37.525,8.575 43.35,2.75 46.927,2.75
  Bottom Layer w0.15: 42.525,8.4 42.525,7.188 42.613,7.1 U2.4
  Bottom Layer w0.35: C4.2@41.725,8.4 42.525,8.4 U2.6
  Bottom Layer w0.5: v1(41.15,7.65) 41.407,7.65 41.7,7.943 C4.2
  other v1: 48.9,0.6 49.375,0.6 49.85,0.6 50.325,0.6 50.8,0.6 51.275,0.6 20.425,0.625 21,0.625 21.575,0.625 41.65,0.625 42.125,0.625 42.6,0.625 43.075,0.625 43.55,0.625 44.025,0.625 44.7,0.625 45.175,0.625 45.65,0.625 46.125,0.625 46.6,0.625 47.075,0.625 20.425,1.225 21,1.225 21.575,1.225 20.425,1.825 41.525,3.825 42,3.825 42.475,3.825 42.95,3.825 43.425,3.825 43.9,3.825 45.425,3.825 45.9,3.825 46.375,3.825 46.85,3.825 47.325,3.825 47.8,3.825
VBUS_SENS: C12.2 D4.1 R14.2 R16.1 U3.5 | length 14.3
  Top Layer w0.15: D4.1 22.8,6 23.4,5.4 C12.2 24,6.7 R16.1@23.9,6.8 ; R16.1 R16.1@23.9,6.8 ; U3.5 33.225,6.971 32.746,7.45 29.964,7.45 28.939,6.425 26.35,6.425 25.975,6.8 R14.2 R16.1@23.9,6.8
VBUS_UF: F1.1 J2.A4_B9 J2.B4_A9 | length 0.1
  Top Layer w0.5: J2.B4_A9 53.695,7.15 J2.B4_A9@53.745,7.2
  other v1: 55.25,2.475 54.525,2.6 55.775,2.7 54.975,3 55.75,3.225 55.2,3.45 55.175,6 55.725,6 55.15,6.575 55.725,6.575 55.625,7.475 52.35,8.2 49.075,8.6 49.55,8.6 50.025,8.6 50.5,8.6 50.975,8.6 51.45,8.6 51.925,8.6 49.325,9.05 49.8,9.05 50.275,9.05 50.75,9.05 51.225,9.05 51.7,9.05 52.175,9.05
pads on no net: J2.0 U2.5 U3.4 U3.20 U3.23 U6.5 U6.8 U6.10

## Polygon pours and split planes (outlines as drawn)
VBUS on Int2 (PWR) "VBUS_L03_P014" (solid, remove dead copper, pour order 14): 0,7.9 12.5,7.9 12.5,1.6 0,1.6 0,0 52.5,0 52.925,0.425 60,0.425 60,9.075 52.925,9.075 52.5,9.5 0,9.5
VBUS_UF on Int2 (PWR) "VBUS_UF_L03_P008" (solid, pour order 8): 48.875,9.5 52.5,9.5 52.925,9.075 60,9.075 60,0.425 52.925,0.425 52.925,6.075 48.875,6.075
NetJ1_2 on Int2 (PWR) "NETJ1_2_L03_P003" (solid, pour order 3): 8.75,7.9 8.75,9.5 20.2,9.5 20.2,0 8.75,0 8.75,1.6 12.5,1.6 12.5,7.9
GND on Top Layer "GND_L01_P013" (solid, remove dead copper, pour order 13): 0,7.9 12.5,7.9 12.5,1.6 0,1.6 0,0 52.5,0 52.925,0.425 60,0.425 60,9.075 52.925,9.075 52.5,9.5 0,9.5
VBUS_UF on Top Layer "VBUS_UF_L01_P010" (solid, pour order 10): 48.75,9.5 52.5,9.5 54.35,7.65 56.05,7.65 56.05,5.825 55.875,5.65 52.32,5.65 51.7,6.27 48.75,6.27
VBUS on Top Layer "VBUS_L01_P009" (solid, pour order 9): 52,0 41.225,0 41.225,4.7 52,4.7
NetJ1_2 on Top Layer "NETJ1_2_L01_P001" (solid, pour order 1): 5.7,7.9 5.7,9.5 15.438,9.5 15.438,0 9.225,0 9.225,1.6 12.5,1.6 12.5,7.9
GND on Int1 (GND) "GND_L02_P012" (solid, remove dead copper, pour order 12): 0,7.9 12.5,7.9 12.5,1.6 0,1.6 0,0 52.5,0 52.925,0.425 60,0.425 60,9.075 52.925,9.075 52.5,9.5 0,9.5
GND on Bottom Layer "GND_L04_P015" (solid, remove dead copper, pour order 15): 0,7.9 12.5,7.9 12.5,1.6 0,1.6 0,0 52.5,0 52.925,0.425 60,0.425 60,9.075 52.925,9.075 52.5,9.5 0,9.5

## Other copper
Top Layer:
  region net VBUS_UF: 53.075,2.021 53.075,2.675 54.175,2.675 ccw(c54.175,2.9) 54.4,2.9 54.4,3.105 54.415,3.105 ccw(c54.475,3.5) 54.816,3.709 56.025,3.709 56.025,1.86 55.32,1.86 ccw(c54.82,1.86) 54.347,2.021
  region net VBUS: 18.975,0.2 21.95,0.2 21.95,2.125 18.975,2.125
  region net NetQ1_1: 15.7,0.2 15.7,4.825 18.125,4.825 18.125,0.2
Int2 (PWR):
  region net 3V3: 40.825,8.35 40.825,9.1 38.975,9.1 38.975,8.35
  rectangle net 3V3: 47.95,6.7 48.7,8.55
  region net VBUS: 21.95,2.225 20.2,2.225 20.2,0.2 21.95,0.2
Bottom Layer:
  rectangle net 3V3: 38.875,8.225 40.8,9.3

## Silkscreen, mask and mechanical layers (free items; w line width, h text height)
Bottom Overlay:
  text "3V3" at 57.75,7.3 h0.5
  text "DIO" at 59.25,5.55 h0.5
  text "DCK" at 59.3,3.45 h0.5
  text "TX" at 33.925,2.175 h0.5
  text "RX" at 36.1,2.175 h0.5
  text "GND" at 31.925,2.15 h0.5
  text "GND" at 57.85,1.85 h0.5
  text "open-rt-pen / V. B.2 / KRSA 2024" at 48.825,0.825 h0.8

## Text inside footprints (layer, text, board x,y; h text height)
J2: Mechanical 13 "PCB EDGE" at 61,10.15 h0.4 r90